# Altium PCB PCB1-C.PcbDoc (part 2 of 4)
Units mil, origin at the board's own origin, x right, y up, seen from the top; angles counter-clockwise.
Board outline 2476.38 x 3779.53 mil, 2 copper layers (Top Layer, Bottom Layer); 106 components, 105 nets, 404 pads, 256 vias.
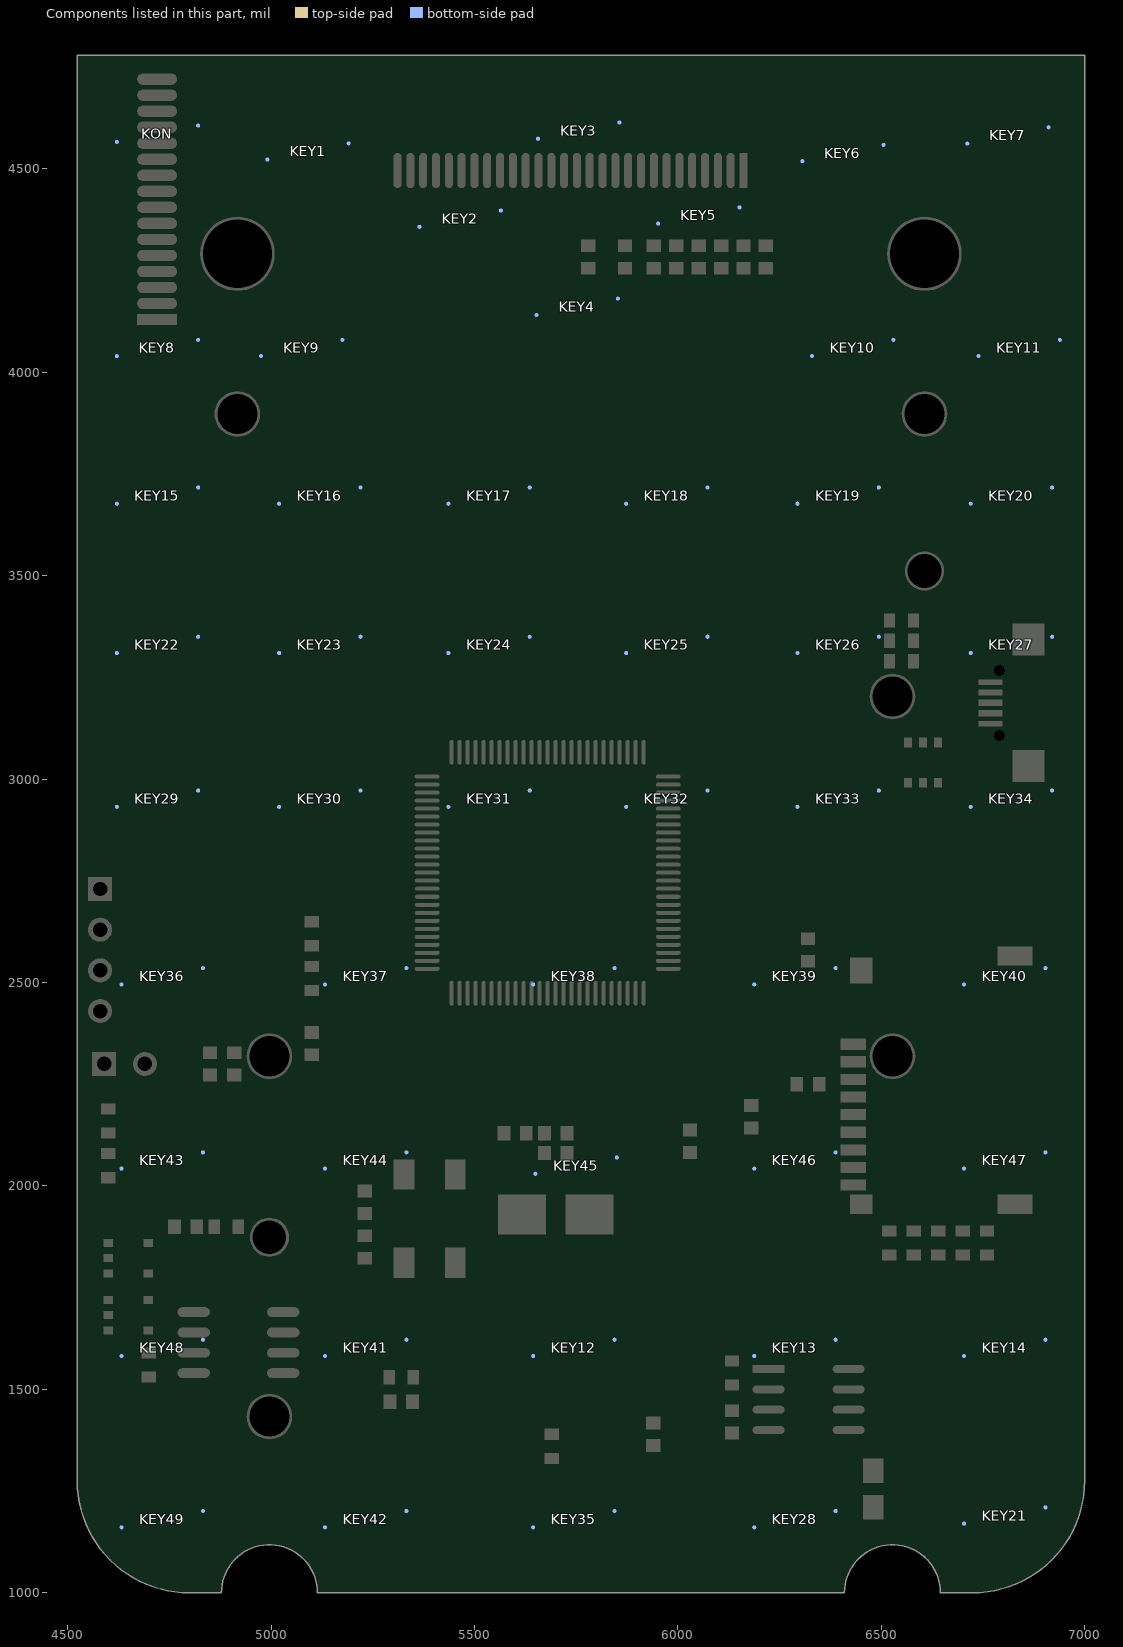
[diagram p2: the components of this part, seen from the top]

## Footprints (in the part's own frame and the unit in brackets; to place one, negate y for a bottom-side part, rotate by r counter-clockwise, add the part's x,y. Pads: shape width x height; smd on the part's side, far side on the other; paste and mask are expansions set on the pad) (continued)
Button#20 [mil]
  round 10 smd: 1(120,0) 2(320,-40)
  Top Layer lines w10: 320.19,-12 319,-12 146,-12 ; 319,26 318.19,26 307,26 150,26 ; 312,-47 160,-47 ; 304,6 140,6 127,6 126,6 ; 303,62 172,62 ; 291,-30 152.5,-30 140,-30 127,-30 ; 287,44 134,44 ; 268,-65 149,-65 ; 211.96,-101.38 cw(c223.45,0.14) 209,-101 cw(c223.45,0.14) 172.3,-88.3 cw(c223.45,0.14) 121.29,1.29 cw(c223.45,0.14) 121.37,4.13 cw(c223.45,0.14) 121.46,6 cw(c223.45,0.14) 127,33.82 cw(c223.45,0.14) 128.95,38.95 cw(c223.45,0.14) 131.18,44 cw(c223.45,0.14) 208.82,101.24 ; 324.43,-7.76 ccw(c222.55,-0.14) 324.28,9.28 ; 324.43,-7.76 ccw(c222.55,-0.14) 324.28,9.28 ; 324.43,-7.76 ccw(c222.55,-0.14) 324.28,9.28 ; 324.43,-7.76 ccw(c222.55,-0.14) 324.28,9.28 ; 324.43,-7.76 cw(c222.55,-0.14) 319,-33.82 ; 324.43,-7.76 cw(c222.55,-0.14) 319,-33.82 ; 324.43,-7.76 cw(c222.55,-0.14) 319,-33.82 ; 324.43,-7.76 cw(c222.55,-0.14) 319,-33.82 ; 324.28,9.28 ccw(c222.55,-0.14) 320.81,27.81 ; 324.28,9.28 ccw(c222.55,-0.14) 320.81,27.81 ; 324.28,9.28 ccw(c222.55,-0.14) 320.81,27.81 ; 324.28,9.28 ccw(c222.55,-0.14) 320.81,27.81 ; 320.81,27.81 ccw(c222.55,-0.14) 303.64,62 ; 320.81,27.81 ccw(c222.55,-0.14) 303.64,62 ; 320.81,27.81 ccw(c222.55,-0.14) 303.64,62 ; 320.81,27.81 ccw(c222.55,-0.14) 303.64,62 ; 319,-33.82 cw(c222.55,-0.14) 316.61,-40 ; 319,-33.82 cw(c222.55,-0.14) 316.61,-40 ; 319,-33.82 cw(c222.55,-0.14) 316.61,-40 ; 319,-33.82 cw(c222.55,-0.14) 316.61,-40 ; 316.61,-40 cw(c222.55,-0.14) 314.82,-44 ; 316.61,-40 cw(c222.55,-0.14) 314.82,-44 ; 316.61,-40 cw(c222.55,-0.14) 314.82,-44 ; 316.61,-40 cw(c222.55,-0.14) 314.82,-44 ; 314.82,-44 cw(c222.55,-0.14) 314.65,-44.35 ; 314.82,-44 cw(c222.55,-0.14) 314.65,-44.35 ; 314.82,-44 cw(c222.55,-0.14) 314.65,-44.35 ; 314.82,-44 cw(c222.55,-0.14) 314.65,-44.35 ; 314.65,-44.35 cw(c222.55,-0.14) 313.67,-46.33 ; 314.65,-44.35 cw(c222.55,-0.14) 313.67,-46.33 ; 314.65,-44.35 cw(c222.55,-0.14) 313.67,-46.33 ; 314.65,-44.35 cw(c222.55,-0.14) 313.67,-46.33 ; 313.67,-46.33 cw(c222.55,-0.14) 313.33,-47 ; 313.67,-46.33 cw(c222.55,-0.14) 313.33,-47 ; 313.67,-46.33 cw(c222.55,-0.14) 313.33,-47 ; 313.67,-46.33 cw(c222.55,-0.14) 313.33,-47 ; 313.33,-47 cw(c222.55,-0.14) 268.74,-91.26 ; 313.33,-47 cw(c222.55,-0.14) 268.74,-91.26 ; 313.33,-47 cw(c222.55,-0.14) 268.74,-91.26 ; 313.33,-47 cw(c222.55,-0.14) 268.74,-91.26 ; 303.64,62 ccw(c222.55,-0.14) 303,62.83 ; 303.64,62 ccw(c222.55,-0.14) 303,62.83 ; 303.64,62 ccw(c222.55,-0.14) 303,62.83 ; 303.64,62 ccw(c222.55,-0.14) 303,62.83 ; 303,62.83 ccw(c222.55,-0.14) 235.89,101.15 ; 303,62.83 ccw(c222.55,-0.14) 235.89,101.15 ; 303,62.83 ccw(c222.55,-0.14) 235.89,101.15 ; 303,62.83 ccw(c222.55,-0.14) 235.89,101.15 ; 268.74,-91.26 cw(c222.55,-0.14) 238.02,-101.12 ; 268.74,-91.26 cw(c222.55,-0.14) 238.02,-101.12 ; 268.74,-91.26 cw(c222.55,-0.14) 238.02,-101.12 ; 268.74,-91.26 cw(c222.55,-0.14) 238.02,-101.12
Button#21 [mil]
  round 10 smd: 1(120,0) 2(320,-40)
  Top Layer lines w7: 320.19,-12 320,-12 319.6,-12 319,-12 318.6,-12 317.6,-12 146,-12 ; 319,26 318.6,26 317.6,26 306.1,26 150,26 ; 312,-47 300.6,-47 298.6,-47 160,-47 ; 303,62 302.6,62 172,62
  Top Layer lines w10: 304,6 136.1,6 130.6,6 127,6 126,6 ; 291,-30 146.6,-30 143.1,-30 130.6,-30 127,-30 ; 287,44 146.1,44 134,44 ; 268,-65 153.6,-65 149,-65 ; 235.89,101.15 cw(c222.55,-0.14) 237,101 cw(c222.55,-0.14) 282.18,82.82 cw(c222.55,-0.14) 283.6,81.78 cw(c222.55,-0.14) 303.6,62.06 cw(c222.55,-0.14) 303.64,62 cw(c222.55,-0.14) 305.5,59.5 cw(c222.55,-0.14) 306.47,58.13 cw(c222.55,-0.14) 315.89,41.4 cw(c222.55,-0.14) 318.6,34.67 cw(c222.55,-0.14) 319,33.55 cw(c222.55,-0.14) 319.6,31.78 cw(c222.55,-0.14) 320,30.53 cw(c222.55,-0.14) 321.6,24.89 cw(c222.55,-0.14) 324.3,9.06 ; 211.96,-101.38 cw(c223.45,0.14) 172.3,-88.3 cw(c223.45,0.14) 130.6,-42.48 cw(c223.45,0.14) 121.29,1.29 cw(c223.45,0.14) 121.46,6 cw(c223.45,0.14) 127,33.82 cw(c223.45,0.14) 128.95,38.95 cw(c223.45,0.14) 208.82,101.24 ; 324.69,-2.09 ccw(c222.55,-0.14) 324.3,9.06 ; 324.69,-2.09 ccw(c222.55,-0.14) 324.3,9.06 ; 324.69,-2.09 cw(c222.55,-0.14) 321.6,-25.16 ; 324.69,-2.09 cw(c222.55,-0.14) 321.6,-25.16 ; 321.6,-25.16 cw(c222.55,-0.14) 321.31,-26.29 ; 321.6,-25.16 cw(c222.55,-0.14) 321.31,-26.29 ; 321.31,-26.29 cw(c222.55,-0.14) 320,-30.81 ; 321.31,-26.29 cw(c222.55,-0.14) 320,-30.81 ; 320,-30.81 cw(c222.55,-0.14) 318.6,-34.94 ; 320,-30.81 cw(c222.55,-0.14) 318.6,-34.94 ; 318.6,-34.94 cw(c222.55,-0.14) 314.65,-44.35 ; 318.6,-34.94 cw(c222.55,-0.14) 314.65,-44.35 ; 314.65,-44.35 cw(c222.55,-0.14) 313.67,-46.33 ; 314.65,-44.35 cw(c222.55,-0.14) 313.67,-46.33 ; 313.67,-46.33 cw(c222.55,-0.14) 238.02,-101.12 ccw(c222.55,-0.14) 313.67,-46.33
Button#22 [mil]
  round 10 smd: 1(120,0) 2(320,-40)
  Top Layer lines w10: 320.19,-12 320,-12 303.5,-12 146,-12 ; 319,26 150,26 ; 312,-47 303.5,-47 303,-47 160,-47 ; 304,6 137.5,6 127,6 126,6 ; 303,62 262.5,62 172,62 ; 291,-30 138.5,-30 127,-30 ; 287,44 134,44 ; 268,-65 153.62,-65 149,-65 ; 211.95,-101.38 cw(c223.45,0.14) 181.75,-93.13 cw(c223.45,0.14) 135.01,-51.01 cw(c223.45,0.14) 130.18,-41.56 cw(c223.45,0.14) 122.23,-13.73 cw(c223.45,0.14) 121.29,0 cw(c223.45,0.14) 121.42,5.42 cw(c223.45,0.14) 121.46,6 cw(c223.45,0.14) 123.28,20.22 cw(c223.45,0.14) 127,33.82 cw(c223.45,0.14) 128.95,38.95 cw(c223.45,0.14) 131.18,44 cw(c223.45,0.14) 208.82,101.24 ; 322,23.25 cw(c222.55,-0.14) 320.19,-30.19 ; 322,23.25 cw(c222.55,-0.14) 320.19,-30.19 ; 322,23.25 cw(c222.55,-0.14) 320.19,-30.19 ; 322,23.25 cw(c222.55,-0.14) 320.19,-30.19 ; 322,23.25 ccw(c222.55,-0.14) 321.76,24.24 ; 322,23.25 ccw(c222.55,-0.14) 321.76,24.24 ; 322,23.25 ccw(c222.55,-0.14) 321.76,24.24 ; 322,23.25 ccw(c222.55,-0.14) 321.76,24.24 ; 321.76,24.24 ccw(c222.55,-0.14) 320.19,29.92 ; 321.76,24.24 ccw(c222.55,-0.14) 320.19,29.92 ; 321.76,24.24 ccw(c222.55,-0.14) 320.19,29.92 ; 321.76,24.24 ccw(c222.55,-0.14) 320.19,29.92 ; 320.19,-30.19 cw(c222.55,-0.14) 320,-30.81 ; 320.19,-30.19 cw(c222.55,-0.14) 320,-30.81 ; 320.19,-30.19 cw(c222.55,-0.14) 320,-30.81 ; 320.19,-30.19 cw(c222.55,-0.14) 320,-30.81 ; 320.19,29.92 ccw(c222.55,-0.14) 320,30.53 ; 320.19,29.92 ccw(c222.55,-0.14) 320,30.53 ; 320.19,29.92 ccw(c222.55,-0.14) 320,30.53 ; 320.19,29.92 ccw(c222.55,-0.14) 320,30.53 ; 320,-30.81 cw(c222.55,-0.14) 316.61,-40 ; 320,-30.81 cw(c222.55,-0.14) 316.61,-40 ; 320,-30.81 cw(c222.55,-0.14) 316.61,-40 ; 320,-30.81 cw(c222.55,-0.14) 316.61,-40 ; 320,30.53 ccw(c222.55,-0.14) 319,33.55 ; 320,30.53 ccw(c222.55,-0.14) 319,33.55 ; 320,30.53 ccw(c222.55,-0.14) 319,33.55 ; 320,30.53 ccw(c222.55,-0.14) 319,33.55 ; 319,33.55 ccw(c222.55,-0.14) 305.5,59.5 ; 319,33.55 ccw(c222.55,-0.14) 305.5,59.5 ; 319,33.55 ccw(c222.55,-0.14) 305.5,59.5 ; 319,33.55 ccw(c222.55,-0.14) 305.5,59.5 ; 316.61,-40 cw(c222.55,-0.14) 313.67,-46.33 ; 316.61,-40 cw(c222.55,-0.14) 313.67,-46.33 ; 316.61,-40 cw(c222.55,-0.14) 313.67,-46.33 ; 316.61,-40 cw(c222.55,-0.14) 313.67,-46.33 ; 313.67,-46.33 cw(c222.55,-0.14) 312.87,-47.87 ; 313.67,-46.33 cw(c222.55,-0.14) 312.87,-47.87 ; 313.67,-46.33 cw(c222.55,-0.14) 312.87,-47.87 ; 313.67,-46.33 cw(c222.55,-0.14) 312.87,-47.87 ; 312.87,-47.87 cw(c222.55,-0.14) 309.6,-53.6 ; 312.87,-47.87 cw(c222.55,-0.14) 309.6,-53.6 ; 312.87,-47.87 cw(c222.55,-0.14) 309.6,-53.6 ; 312.87,-47.87 cw(c222.55,-0.14) 309.6,-53.6 ; 309.6,-53.6 cw(c222.55,-0.14) 238.02,-101.12 ; 309.6,-53.6 cw(c222.55,-0.14) 238.02,-101.12 ; 309.6,-53.6 cw(c222.55,-0.14) 238.02,-101.12 ; 309.6,-53.6 cw(c222.55,-0.14) 238.02,-101.12 ; 305.5,59.5 ccw(c222.55,-0.14) 304.1,61.4 ; 305.5,59.5 ccw(c222.55,-0.14) 304.1,61.4 ; 305.5,59.5 ccw(c222.55,-0.14) 304.1,61.4 ; 305.5,59.5 ccw(c222.55,-0.14) 304.1,61.4 ; 304.1,61.4 ccw(c222.55,-0.14) 282.84,82.34 ; 304.1,61.4 ccw(c222.55,-0.14) 282.84,82.34 ; 304.1,61.4 ccw(c222.55,-0.14) 282.84,82.34 ; 304.1,61.4 ccw(c222.55,-0.14) 282.84,82.34 ; 282.84,82.34 ccw(c222.55,-0.14) 235.89,101.15 ; 282.84,82.34 ccw(c222.55,-0.14) 235.89,101.15 ; 282.84,82.34 ccw(c222.55,-0.14) 235.89,101.15 ; 282.84,82.34 ccw(c222.55,-0.14) 235.89,101.15
Button#23 [mil]
  round 10 smd: 1(120,0) 2(320,-40)
  Top Layer lines w10: 320.19,-12 315,-12 146,-12 ; 319,26 307.5,26 150,26 ; 312,-47 302.5,-47 160,-47 ; 304,6 131,6 129.95,6 127,6 126,6 ; 303,62 301.5,62 301,62 172,62 ; 291,-30 150,-30 131,-30 129.95,-30 127,-30 ; 287,44 134,44 ; 268,-65 149,-65 ; 238.02,-101.12 ccw(c222.55,-0.14) 314.65,-44.35 ccw(c222.55,-0.14) 316.61,-40 ccw(c222.55,-0.14) 320.57,-28.93 ccw(c222.55,-0.14) 321,-27.43 ccw(c222.55,-0.14) 324.69,-2.31 ccw(c222.55,-0.14) 324,11.91 ccw(c222.55,-0.14) 322.08,22.92 ccw(c222.55,-0.14) 320.19,29.92 ccw(c222.55,-0.14) 319,33.55 ccw(c222.55,-0.14) 309.5,53.5 ccw(c222.55,-0.14) 308.66,54.84 ccw(c222.55,-0.14) 305.5,59.5 ccw(c222.55,-0.14) 303.64,62 ccw(c222.55,-0.14) 277.53,85.97 ccw(c222.55,-0.14) 235.89,101.15 ; 211.96,-101.38 cw(c223.45,0.14) 169.46,-86.6 cw(c223.45,0.14) 143.82,-63.86 cw(c223.45,0.14) 135.15,-51.24 cw(c223.45,0.14) 135.01,-51.01 cw(c223.45,0.14) 132.88,-47.12 cw(c223.45,0.14) 129.95,-41.04 cw(c223.45,0.14) 127,-33.55 cw(c223.45,0.14) 121.46,6 cw(c223.45,0.14) 126,30.81 cw(c223.45,0.14) 127,33.82 cw(c223.45,0.14) 128.95,38.95 cw(c223.45,0.14) 129.95,41.31 cw(c223.45,0.14) 130.47,42.47 cw(c223.45,0.14) 208.82,101.24
Button#24 [mil]
  round 10 smd: 1(120,0) 2(320,-40)
  Top Layer lines w10: 320.19,-12 318.5,-12 318,-12 146,-12 ; 319,26 318.5,26 306,26 150,26 ; 312,-47 306,-47 160,-47 ; 304,6 130,6 129,6 128,6 126,6 ; 303,62 172,62 ; 291,-30 143.5,-30 138.5,-30 129.22,-30 129,-30 128,-30 127,-30 ; 287,44 140,44 134,44 ; 268,-65 166,-65 154,-65 149,-65 ; 238.02,-101.12 ccw(c222.55,-0.14) 314.65,-44.35 ccw(c222.55,-0.14) 316.61,-40 ccw(c222.55,-0.14) 320.19,-30.19 ccw(c222.55,-0.14) 319,33.55 ccw(c222.55,-0.14) 318.5,34.95 ccw(c222.55,-0.14) 305.5,59.5 ccw(c222.55,-0.14) 237,101 ccw(c222.55,-0.14) 235.89,101.15 ; 211.95,-101.38 cw(c223.45,0.14) 188.78,-95.97 cw(c223.45,0.14) 137.34,-54.84 cw(c223.45,0.14) 135.01,-51.01 cw(c223.45,0.14) 130.73,-42.77 cw(c223.45,0.14) 129.88,-40.88 cw(c223.45,0.14) 129.02,-38.86 cw(c223.45,0.14) 129,-38.81 cw(c223.45,0.14) 128,-36.29 cw(c223.45,0.14) 121.29,1.29 cw(c223.45,0.14) 128,36.56 cw(c223.45,0.14) 128.95,38.95 cw(c223.45,0.14) 131.18,44 cw(c223.45,0.14) 208.82,101.24
Button#25 [mil]
  round 10 smd: 1(120,0) 2(320,-40)
  Top Layer lines w7: 320.19,-12 319,-12 318,-12 146,-12 ; 319,26 308.5,26 150,26 ; 312,-47 300,-47 160,-47 ; 303,62 302,62 172,62
  Top Layer lines w10: 304,6 139,6 127,6 126,6 ; 291,-30 155.5,-30 138.5,-30 127,-30 ; 287,44 134,44 ; 268,-65 228,-65 155.5,-65 149,-65 ; 238.02,-101.12 ccw(c222.55,-0.14) 268.74,-91.26 ccw(c222.55,-0.14) 313.33,-47 ccw(c222.55,-0.14) 313.67,-46.33 ccw(c222.55,-0.14) 314.65,-44.35 ccw(c222.55,-0.14) 316.61,-40 ccw(c222.55,-0.14) 321.52,-25.48 ccw(c222.55,-0.14) 324.02,-12 ccw(c222.55,-0.14) 320.19,29.92 ccw(c222.55,-0.14) 319,33.55 ccw(c222.55,-0.14) 307.73,56.27 ccw(c222.55,-0.14) 305.5,59.5 ccw(c222.55,-0.14) 303.64,62 ccw(c222.55,-0.14) 235.89,101.15 ; 211.96,-101.38 cw(c223.45,0.14) 135.01,-51.01 cw(c223.45,0.14) 122.23,-13.73 cw(c223.45,0.14) 121.29,0 cw(c223.45,0.14) 121.42,5.42 cw(c223.45,0.14) 121.46,6 cw(c223.45,0.14) 123.54,21.46 cw(c223.45,0.14) 127,33.82 cw(c223.45,0.14) 128.95,38.95 cw(c223.45,0.14) 131.18,44 cw(c223.45,0.14) 208.82,101.24
Button#26 [mil]
  round 10 smd: 1(120,0) 2(320,-40)
  Top Layer lines w10: 320.19,-12 319,-12 299,-12 146,-12 ; 319,26 150,26 ; 312,-47 303,-47 160,-47 ; 304,6 139,6 127,6 126,6 ; 303,62 301.5,62 172,62 ; 291,-30 143,-30 141,-30 127,-30 ; 287,44 134,44 ; 268,-65 157,-65 149,-65 ; 238.02,-101.12 ccw(c222.55,-0.14) 313.33,-47 ccw(c222.55,-0.14) 314.65,-44.35 ccw(c222.55,-0.14) 316.61,-40 ccw(c222.55,-0.14) 319,-33.82 ccw(c222.55,-0.14) 324,11.91 ccw(c222.55,-0.14) 322.08,22.92 ccw(c222.55,-0.14) 321.31,26 ccw(c222.55,-0.14) 320.19,29.92 ccw(c222.55,-0.14) 319.78,31.23 ccw(c222.55,-0.14) 319,33.55 ccw(c222.55,-0.14) 308.66,54.84 ccw(c222.55,-0.14) 305.5,59.5 ccw(c222.55,-0.14) 235.89,101.15 ; 211.96,-101.38 cw(c223.45,0.14) 140.5,-59.5 cw(c223.45,0.14) 135.01,-51.01 cw(c223.45,0.14) 121.29,1.29 cw(c223.45,0.14) 121.46,6 cw(c223.45,0.14) 127,33.82 cw(c223.45,0.14) 128.95,38.95 cw(c223.45,0.14) 128.97,39 cw(c223.45,0.14) 131.18,44 cw(c223.45,0.14) 208.82,101.24
Button#27 [mil]
  round 10 smd: 1(120,0) 2(320,-40)
  Top Layer lines w10: 320.19,-12 315,-12 146,-12 ; 319,26 150,26 ; 312,-47 160,-47 ; 304,6 140,6 130,6 127.5,6 127,6 126,6 ; 303,62 302.5,62 172,62 ; 291,-30 140,-30 132.5,-30 130,-30 127,-30 ; 287,44 140,44 134,44 ; 268,-65 149,-65 ; 208.82,101.24 ccw(c223.45,0.14) 207.22,101 ccw(c223.45,0.14) 188.14,96 ccw(c223.45,0.14) 179.94,92.57 ; 324.69,-2.31 ccw(c222.55,-0.14) 321.31,26 ; 324.69,-2.31 ccw(c222.55,-0.14) 321.31,26 ; 324.69,-2.31 ccw(c222.55,-0.14) 321.31,26 ; 324.69,-2.31 ccw(c222.55,-0.14) 321.31,26 ; 324.69,-2.31 cw(c222.55,-0.14) 324.26,-9.74 ; 324.69,-2.31 cw(c222.55,-0.14) 324.26,-9.74 ; 324.69,-2.31 cw(c222.55,-0.14) 324.26,-9.74 ; 324.69,-2.31 cw(c222.55,-0.14) 324.26,-9.74 ; 324.26,-9.74 cw(c222.55,-0.14) 323,-18.76 ; 324.26,-9.74 cw(c222.55,-0.14) 323,-18.76 ; 324.26,-9.74 cw(c222.55,-0.14) 323,-18.76 ; 324.26,-9.74 cw(c222.55,-0.14) 323,-18.76 ; 323,-18.76 cw(c222.55,-0.14) 320.19,-30.19 ; 323,-18.76 cw(c222.55,-0.14) 320.19,-30.19 ; 323,-18.76 cw(c222.55,-0.14) 320.19,-30.19 ; 323,-18.76 cw(c222.55,-0.14) 320.19,-30.19 ; 321.31,26 ccw(c222.55,-0.14) 320.19,29.92 ; 321.31,26 ccw(c222.55,-0.14) 320.19,29.92 ; 321.31,26 ccw(c222.55,-0.14) 320.19,29.92 ; 321.31,26 ccw(c222.55,-0.14) 320.19,29.92 ; 320.19,-30.19 cw(c222.55,-0.14) 320,-30.81 ; 320.19,-30.19 cw(c222.55,-0.14) 320,-30.81 ; 320.19,-30.19 cw(c222.55,-0.14) 320,-30.81 ; 320.19,-30.19 cw(c222.55,-0.14) 320,-30.81 ; 320.19,29.92 ccw(c222.55,-0.14) 319,33.55 ; 320.19,29.92 ccw(c222.55,-0.14) 319,33.55 ; 320.19,29.92 ccw(c222.55,-0.14) 319,33.55 ; 320.19,29.92 ccw(c222.55,-0.14) 319,33.55 ; 320,-30.81 cw(c222.55,-0.14) 314.65,-44.35 ; 320,-30.81 cw(c222.55,-0.14) 314.65,-44.35 ; 320,-30.81 cw(c222.55,-0.14) 314.65,-44.35 ; 320,-30.81 cw(c222.55,-0.14) 314.65,-44.35 ; 319,33.55 ccw(c222.55,-0.14) 306.69,57.81 ; 319,33.55 ccw(c222.55,-0.14) 306.69,57.81 ; 319,33.55 ccw(c222.55,-0.14) 306.69,57.81 ; 319,33.55 ccw(c222.55,-0.14) 306.69,57.81 ; 314.65,-44.35 cw(c222.55,-0.14) 313.67,-46.33 ; 314.65,-44.35 cw(c222.55,-0.14) 313.67,-46.33 ; 314.65,-44.35 cw(c222.55,-0.14) 313.67,-46.33 ; 314.65,-44.35 cw(c222.55,-0.14) 313.67,-46.33 ; 313.67,-46.33 cw(c222.55,-0.14) 268.74,-91.26 ; 313.67,-46.33 cw(c222.55,-0.14) 268.74,-91.26 ; 313.67,-46.33 cw(c222.55,-0.14) 268.74,-91.26 ; 313.67,-46.33 cw(c222.55,-0.14) 268.74,-91.26 ; 306.69,57.81 ccw(c222.55,-0.14) 305.5,59.5 ; 306.69,57.81 ccw(c222.55,-0.14) 305.5,59.5 ; 306.69,57.81 ccw(c222.55,-0.14) 305.5,59.5 ; 306.69,57.81 ccw(c222.55,-0.14) 305.5,59.5 ; 305.5,59.5 ccw(c222.55,-0.14) 235.89,101.15 ; 305.5,59.5 ccw(c222.55,-0.14) 235.89,101.15 ; 305.5,59.5 ccw(c222.55,-0.14) 235.89,101.15 ; 305.5,59.5 ccw(c222.55,-0.14) 235.89,101.15 ; 268.74,-91.26 cw(c222.55,-0.14) 238.02,-101.12 ccw(c222.55,-0.14) 268.74,-91.26 ; 211.96,-101.38 cw(c223.45,0.14) 135.01,-51.01 ; 211.96,-101.38 cw(c223.45,0.14) 135.01,-51.01 ; 211.96,-101.38 cw(c223.45,0.14) 135.01,-51.01 ; 211.96,-101.38 cw(c223.45,0.14) 135.01,-51.01 ; 179.94,92.57 ccw(c223.45,0.14) 134,49.49 ; 179.94,92.57 ccw(c223.45,0.14) 134,49.49 ; 179.94,92.57 ccw(c223.45,0.14) 134,49.49 ; 179.94,92.57 ccw(c223.45,0.14) 134,49.49 ; 135.01,-51.01 cw(c223.45,0.14) 130,-41.15 ; 135.01,-51.01 cw(c223.45,0.14) 130,-41.15 ; 135.01,-51.01 cw(c223.45,0.14) 130,-41.15 ; 135.01,-51.01 cw(c223.45,0.14) 130,-41.15 ; 134,49.49 ccw(c223.45,0.14) 127,33.82 ; 134,49.49 ccw(c223.45,0.14) 127,33.82 ; 134,49.49 ccw(c223.45,0.14) 127,33.82 ; 134,49.49 ccw(c223.45,0.14) 127,33.82 ; 130,-41.15 cw(c223.45,0.14) 125.33,-28.33 ; 130,-41.15 cw(c223.45,0.14) 125.33,-28.33 ; 130,-41.15 cw(c223.45,0.14) 125.33,-28.33 ; 130,-41.15 cw(c223.45,0.14) 125.33,-28.33 ; 127,33.82 ccw(c223.45,0.14) 124,23.52 ; 127,33.82 ccw(c223.45,0.14) 124,23.52 ; 127,33.82 ccw(c223.45,0.14) 124,23.52 ; 127,33.82 ccw(c223.45,0.14) 124,23.52 ; 125.33,-28.33 cw(c223.45,0.14) 123.25,-19.8 ; 125.33,-28.33 cw(c223.45,0.14) 123.25,-19.8 ; 125.33,-28.33 cw(c223.45,0.14) 123.25,-19.8 ; 125.33,-28.33 cw(c223.45,0.14) 123.25,-19.8 ; 124,23.52 ccw(c223.45,0.14) 121.53,7.12 ; 124,23.52 ccw(c223.45,0.14) 121.53,7.12 ; 124,23.52 ccw(c223.45,0.14) 121.53,7.12 ; 124,23.52 ccw(c223.45,0.14) 121.53,7.12 ; 123.25,-19.8 cw(c223.45,0.14) 121.29,-0.21 ; 123.25,-19.8 cw(c223.45,0.14) 121.29,-0.21 ; 123.25,-19.8 cw(c223.45,0.14) 121.29,-0.21 ; 123.25,-19.8 cw(c223.45,0.14) 121.29,-0.21 ; 121.53,7.12 ccw(c223.45,0.14) 121.29,0 ; 121.53,7.12 ccw(c223.45,0.14) 121.29,0 ; 121.53,7.12 ccw(c223.45,0.14) 121.29,0 ; 121.53,7.12 ccw(c223.45,0.14) 121.29,0 ; 121.29,-0.21 cw(c223.45,0.14) 121.29,0 ; 121.29,-0.21 cw(c223.45,0.14) 121.29,0 ; 121.29,-0.21 cw(c223.45,0.14) 121.29,0 ; 121.29,-0.21 cw(c223.45,0.14) 121.29,0
Button#28 [mil]
  round 10 smd: 1(120,0) 2(320,-40)
  Top Layer lines w7: 320.19,-12 320,-12 319.9,-12 301.9,-12 146,-12 ; 319,26 150,26 ; 312,-47 298.9,-47 160,-47 ; 303,62 289.9,62 172,62
  Top Layer lines w10: 304,6 145.4,6 127,6 126,6 ; 291,-30 137.4,-30 132.9,-30 127,-30 ; 287,44 134,44 ; 268,-65 149,-65 ; 238.02,-101.12 ccw(c222.55,-0.14) 313.33,-47 ccw(c222.55,-0.14) 314.37,-44.93 ccw(c222.55,-0.14) 318.9,-34.1 ccw(c222.55,-0.14) 320,-30.81 ccw(c222.55,-0.14) 323.53,-15.63 ccw(c222.55,-0.14) 320.19,29.92 ccw(c222.55,-0.14) 320,30.53 ccw(c222.55,-0.14) 319,33.55 ccw(c222.55,-0.14) 303.64,62 ccw(c222.55,-0.14) 282.18,82.82 ccw(c222.55,-0.14) 237,101 ccw(c222.55,-0.14) 235.89,101.15 ; 211.96,-101.38 cw(c223.45,0.14) 198.77,-99 cw(c223.45,0.14) 144.74,-65 cw(c223.45,0.14) 127.82,-35.81 cw(c223.45,0.14) 126,-30.53 cw(c223.45,0.14) 122.42,-15.02 cw(c223.45,0.14) 121.29,0 cw(c223.45,0.14) 121.43,5.53 cw(c223.45,0.14) 127,33.82 cw(c223.45,0.14) 128.95,38.95 cw(c223.45,0.14) 208.82,101.24
Button#29 [mil]
  round 10 smd: 1(120,0) 2(320,-40)
  Top Layer lines w10: 320.19,-12 320,-12 319,-12 308.63,-12 303.5,-12 146,-12 ; 319,26 314,26 150,26 ; 312,-47 308.49,-47 306.5,-47 295,-47 160,-47 ; 304,6 126,6 ; 303,62 172,62 ; 291,-30 146,-30 136,-30 127,-30 ; 287,44 134,44 ; 268,-65 156,-65 149,-65 ; 320.19,-30.19 cw(c222.55,-0.14) 320,-30.81 ; 320.19,-30.19 cw(c222.55,-0.14) 320,-30.81 ; 320.19,-30.19 ccw(c222.55,-0.14) 320.19,29.92 ; 320.19,-30.19 cw(c222.55,-0.14) 320,-30.81 ; 320.19,-30.19 cw(c222.55,-0.14) 320,-30.81 ; 320.19,-30.19 ccw(c222.55,-0.14) 320.19,29.92 ; 320.19,-30.19 ccw(c222.55,-0.14) 320.19,29.92 ; 320.19,-30.19 ccw(c222.55,-0.14) 320.19,29.92 ; 320.19,29.92 ccw(c222.55,-0.14) 320,30.53 ; 320.19,29.92 ccw(c222.55,-0.14) 320,30.53 ; 320.19,29.92 ccw(c222.55,-0.14) 320,30.53 ; 320.19,29.92 ccw(c222.55,-0.14) 320,30.53 ; 320,-30.81 cw(c222.55,-0.14) 319,-33.82 ; 320,-30.81 cw(c222.55,-0.14) 319,-33.82 ; 320,-30.81 cw(c222.55,-0.14) 319,-33.82 ; 320,-30.81 cw(c222.55,-0.14) 319,-33.82 ; 320,30.53 ccw(c222.55,-0.14) 319,33.55 ; 320,30.53 ccw(c222.55,-0.14) 319,33.55 ; 320,30.53 ccw(c222.55,-0.14) 319,33.55 ; 320,30.53 ccw(c222.55,-0.14) 319,33.55 ; 319,-33.82 cw(c222.55,-0.14) 318.62,-34.88 ; 319,-33.82 cw(c222.55,-0.14) 318.62,-34.88 ; 319,-33.82 cw(c222.55,-0.14) 318.62,-34.88 ; 319,-33.82 cw(c222.55,-0.14) 318.62,-34.88 ; 319,33.55 ccw(c222.55,-0.14) 305.5,59.5 ; 319,33.55 ccw(c222.55,-0.14) 305.5,59.5 ; 319,33.55 ccw(c222.55,-0.14) 305.5,59.5 ; 319,33.55 ccw(c222.55,-0.14) 305.5,59.5 ; 318.62,-34.88 cw(c222.55,-0.14) 316.61,-40 ; 318.62,-34.88 cw(c222.55,-0.14) 316.61,-40 ; 318.62,-34.88 cw(c222.55,-0.14) 316.61,-40 ; 318.62,-34.88 cw(c222.55,-0.14) 316.61,-40 ; 316.61,-40 cw(c222.55,-0.14) 314.65,-44.35 ; 316.61,-40 cw(c222.55,-0.14) 314.65,-44.35 ; 316.61,-40 cw(c222.55,-0.14) 314.65,-44.35 ; 316.61,-40 cw(c222.55,-0.14) 314.65,-44.35 ; 314.65,-44.35 cw(c222.55,-0.14) 313.67,-46.33 ; 314.65,-44.35 cw(c222.55,-0.14) 313.67,-46.33 ; 314.65,-44.35 cw(c222.55,-0.14) 313.67,-46.33 ; 314.65,-44.35 cw(c222.55,-0.14) 313.67,-46.33 ; 313.67,-46.33 cw(c222.55,-0.14) 308.49,-55.37 ; 313.67,-46.33 cw(c222.55,-0.14) 308.49,-55.37 ; 313.67,-46.33 cw(c222.55,-0.14) 308.49,-55.37 ; 313.67,-46.33 cw(c222.55,-0.14) 308.49,-55.37 ; 308.49,-55.37 cw(c222.55,-0.14) 308.3,-55.67 ; 308.49,-55.37 cw(c222.55,-0.14) 308.3,-55.67 ; 308.49,-55.37 cw(c222.55,-0.14) 308.3,-55.67 ; 308.49,-55.37 cw(c222.55,-0.14) 308.3,-55.67 ; 308.3,-55.67 cw(c222.55,-0.14) 268.74,-91.26 ; 308.3,-55.67 cw(c222.55,-0.14) 268.74,-91.26 ; 308.3,-55.67 cw(c222.55,-0.14) 268.74,-91.26 ; 308.3,-55.67 cw(c222.55,-0.14) 268.74,-91.26 ; 305.5,59.5 ccw(c222.55,-0.14) 235.89,101.15 ; 305.5,59.5 ccw(c222.55,-0.14) 235.89,101.15 ; 305.5,59.5 ccw(c222.55,-0.14) 235.89,101.15 ; 305.5,59.5 ccw(c222.55,-0.14) 235.89,101.15 ; 268.74,-91.26 cw(c222.55,-0.14) 238.02,-101.12 ; 268.74,-91.26 cw(c222.55,-0.14) 238.02,-101.12 ; 268.74,-91.26 cw(c222.55,-0.14) 238.02,-101.12 ; 268.74,-91.26 cw(c222.55,-0.14) 238.02,-101.12 ; 211.96,-101.38 cw(c223.45,0.14) 144.74,-65 ; 211.96,-101.38 cw(c223.45,0.14) 144.74,-65 ; 211.96,-101.38 cw(c223.45,0.14) 144.74,-65 ; 211.96,-101.38 cw(c223.45,0.14) 144.74,-65 ; 208.82,101.24 ccw(c223.45,0.14) 132.11,45.89 ; 208.82,101.24 ccw(c223.45,0.14) 132.11,45.89 ; 208.82,101.24 ccw(c223.45,0.14) 132.11,45.89 ; 208.82,101.24 ccw(c223.45,0.14) 132.11,45.89 ; 144.74,-65 cw(c223.45,0.14) 135.01,-51.01 ; 144.74,-65 cw(c223.45,0.14) 135.01,-51.01 ; 144.74,-65 cw(c223.45,0.14) 135.01,-51.01 ; 144.74,-65 cw(c223.45,0.14) 135.01,-51.01 ; 135.01,-51.01 cw(c223.45,0.14) 131.54,-44.46 ; 135.01,-51.01 cw(c223.45,0.14) 131.54,-44.46 ; 135.01,-51.01 cw(c223.45,0.14) 131.54,-44.46 ; 135.01,-51.01 cw(c223.45,0.14) 131.54,-44.46 ; 132.11,45.89 ccw(c223.45,0.14) 131.18,44 ; 132.11,45.89 ccw(c223.45,0.14) 131.18,44 ; 132.11,45.89 ccw(c223.45,0.14) 131.18,44 ; 132.11,45.89 ccw(c223.45,0.14) 131.18,44 ; 131.54,-44.46 cw(c223.45,0.14) 128.07,-36.47 ; 131.54,-44.46 cw(c223.45,0.14) 128.07,-36.47 ; 131.54,-44.46 cw(c223.45,0.14) 128.07,-36.47 ; 131.54,-44.46 cw(c223.45,0.14) 128.07,-36.47 ; 131.18,44 ccw(c223.45,0.14) 121.46,6 ; 131.18,44 ccw(c223.45,0.14) 121.46,6 ; 131.18,44 ccw(c223.45,0.14) 121.46,6 ; 131.18,44 ccw(c223.45,0.14) 121.46,6 ; 128.07,-36.47 cw(c223.45,0.14) 126,-30.53 ; 128.07,-36.47 cw(c223.45,0.14) 126,-30.53 ; 128.07,-36.47 cw(c223.45,0.14) 126,-30.53 ; 128.07,-36.47 cw(c223.45,0.14) 126,-30.53 ; 126,-30.53 cw(c223.45,0.14) 122.68,-16.68 ; 126,-30.53 cw(c223.45,0.14) 122.68,-16.68 ; 126,-30.53 cw(c223.45,0.14) 122.68,-16.68 ; 126,-30.53 cw(c223.45,0.14) 122.68,-16.68 ; 122.68,-16.68 cw(c223.45,0.14) 121.3,-1.3 ; 122.68,-16.68 cw(c223.45,0.14) 121.3,-1.3 ; 122.68,-16.68 cw(c223.45,0.14) 121.3,-1.3 ; 122.68,-16.68 cw(c223.45,0.14) 121.3,-1.3 ; 121.46,6 ccw(c223.45,0.14) 121.3,-1.3 ; 121.46,6 ccw(c223.45,0.14) 121.3,-1.3 ; 121.46,6 ccw(c223.45,0.14) 121.3,-1.3 ; 121.46,6 ccw(c223.45,0.14) 121.3,-1.3
Button#30 [mil]
  round 10 smd: 1(120,0) 2(320,-40)
  Top Layer lines w10: 320.19,-12 146,-12 ; 319,26 150,26 ; 312,-47 160,-47 ; 304,6 136.5,6 127,6 126,6 ; 303,62 299.84,62 299,62 172,62 ; 291,-30 148,-30 141.5,-30 127,-30 ; 287,44 135,44 134,44 ; 268,-65 153,-65 151.11,-65 149,-65 ; 238.02,-101.12 ccw(c222.55,-0.14) 313.33,-47 ccw(c222.55,-0.14) 313.67,-46.33 ccw(c222.55,-0.14) 316.61,-40 ccw(c222.55,-0.14) 324.43,-7.76 ccw(c222.55,-0.14) 322.08,22.92 ccw(c222.55,-0.14) 320.19,29.92 ccw(c222.55,-0.14) 319,33.55 ccw(c222.55,-0.14) 312.27,48.73 ccw(c222.55,-0.14) 310.27,52.23 ccw(c222.55,-0.14) 305.5,59.5 ccw(c222.55,-0.14) 303.64,62 ccw(c222.55,-0.14) 252.69,97.48 ccw(c222.55,-0.14) 250.95,98 ccw(c222.55,-0.14) 235.89,101.15 ; 211.96,-101.38 cw(c223.45,0.14) 151.11,-72 cw(c223.45,0.14) 135.01,-51.01 cw(c223.45,0.14) 121.29,1.29 cw(c223.45,0.14) 121.46,6 cw(c223.45,0.14) 127,33.82 cw(c223.45,0.14) 128.28,37.28 cw(c223.45,0.14) 128.95,38.95 cw(c223.45,0.14) 208.82,101.24
Button#31 [mil]
  round 10 smd: 1(120,0) 2(320,-40)
  Top Layer lines w10: 320.19,-12 320,-12 319,-12 146,-12 ; 319,26 316,26 150,26 ; 312,-47 160,-47 ; 304,6 132,6 131,6 127,6 126,6 ; 303,62 294.5,62 172,62 ; 291,-30 132,-30 131,-30 127,-30 ; 287,44 143.5,44 134,44 ; 268,-65 149,-65 ; 238.02,-101.12 ccw(c222.55,-0.14) 314.65,-44.35 ccw(c222.55,-0.14) 316.61,-40 ccw(c222.55,-0.14) 319,-33.82 ccw(c222.55,-0.14) 320,-30.81 ccw(c222.55,-0.14) 320.19,-30.19 ccw(c222.55,-0.14) 319,33.55 ccw(c222.55,-0.14) 316.5,40 ccw(c222.55,-0.14) 316,41.15 ccw(c222.55,-0.14) 305.5,59.5 ccw(c222.55,-0.14) 303.64,62 ccw(c222.55,-0.14) 282.18,82.82 ccw(c222.55,-0.14) 254.2,97 ccw(c222.55,-0.14) 235.89,101.15 ; 211.96,-101.38 cw(c223.45,0.14) 144.74,-65 cw(c223.45,0.14) 135.01,-51.01 cw(c223.45,0.14) 131,-43.34 cw(c223.45,0.14) 127,-33.55 cw(c223.45,0.14) 126,-30.53 cw(c223.45,0.14) 123.92,-22.92 cw(c223.45,0.14) 121.29,-1.03 cw(c223.45,0.14) 121.29,1.29 cw(c223.45,0.14) 121.46,6 cw(c223.45,0.14) 127,33.82 cw(c223.45,0.14) 128.95,38.95 cw(c223.45,0.14) 131.18,44 cw(c223.45,0.14) 208.82,101.24
Button#32 [mil]
  round 10 smd: 1(120,0) 2(320,-40)
  Top Layer lines w7: 320.19,-12 319,-12 146,-12 ; 319,26 150,26 ; 312,-47 292,-47 283,-47 160,-47 ; 303,62 172,62
  Top Layer lines w10: 304,6 127,6 126,6 ; 291,-30 141.5,-30 127,-30 ; 287,44 137,44 134,44 ; 268,-65 230.5,-65 149,-65 ; 238.02,-101.12 ccw(c222.55,-0.14) 314.65,-44.35 ccw(c222.55,-0.14) 315.53,-42.47 ccw(c222.55,-0.14) 324,-12.18 ccw(c222.55,-0.14) 324.43,-7.76 ccw(c222.55,-0.14) 324.51,-6.49 ccw(c222.55,-0.14) 324,11.91 ccw(c222.55,-0.14) 322.08,22.92 ccw(c222.55,-0.14) 320.19,29.92 ccw(c222.55,-0.14) 319,33.55 ccw(c222.55,-0.14) 303.64,62 ccw(c222.55,-0.14) 282.18,82.82 ccw(c222.55,-0.14) 272.47,89 ccw(c222.55,-0.14) 247.23,99 ccw(c222.55,-0.14) 235.89,101.15 ; 211.96,-101.38 cw(c223.45,0.14) 192.78,-97.31 cw(c223.45,0.14) 153.14,-73.99 cw(c223.45,0.14) 144.74,-65 cw(c223.45,0.14) 135.01,-51.01 cw(c223.45,0.14) 126,-30.53 cw(c223.45,0.14) 121.82,-10.32 cw(c223.45,0.14) 121.29,1.29 cw(c223.45,0.14) 121.42,5.42 cw(c223.45,0.14) 121.46,6 cw(c223.45,0.14) 127,33.82 cw(c223.45,0.14) 127.1,34.1 cw(c223.45,0.14) 128.95,38.95 cw(c223.45,0.14) 208.82,101.24
Button#33 [mil]
  round 10 smd: 1(120,0) 2(320,-40)
  Top Layer lines w10: 320.19,-12 320,-12 311,-12 146,-12 ; 319,26 150,26 ; 312,-47 299.5,-47 160,-47 ; 304,6 136.5,6 129,6 126.5,6 126,6 ; 303,62 302,62 301.5,62 293,62 172,62 ; 291,-30 148,-30 141.5,-30 129,-30 127,-30 ; 287,44 145,44 134,44 ; 268,-65 149,-65 ; 238.02,-101.12 ccw(c222.55,-0.14) 314.65,-44.35 ccw(c222.55,-0.14) 316.61,-40 ccw(c222.55,-0.14) 320,-30.81 ccw(c222.55,-0.14) 323.57,-15.38 ccw(c222.55,-0.14) 324,-12.18 ccw(c222.55,-0.14) 324,11.91 ccw(c222.55,-0.14) 320,30.53 ccw(c222.55,-0.14) 319,33.55 ccw(c222.55,-0.14) 317.55,37.45 ccw(c222.55,-0.14) 308.66,54.84 ccw(c222.55,-0.14) 307.73,56.27 ccw(c222.55,-0.14) 305.5,59.5 ccw(c222.55,-0.14) 260.14,94.86 ccw(c222.55,-0.14) 237,101 ccw(c222.55,-0.14) 235.89,101.15 ; 211.96,-101.38 cw(c223.45,0.14) 138.27,-56.27 ; 211.96,-101.38 cw(c223.45,0.14) 138.27,-56.27 ; 211.96,-101.38 cw(c223.45,0.14) 138.27,-56.27 ; 211.96,-101.38 cw(c223.45,0.14) 138.27,-56.27 ; 208.82,101.24 ccw(c223.45,0.14) 168.01,85.95 ; 208.82,101.24 ccw(c223.45,0.14) 168.01,85.95 ; 208.82,101.24 ccw(c223.45,0.14) 168.01,85.95 ; 208.82,101.24 ccw(c223.45,0.14) 168.01,85.95 ; 168.01,85.94 ccw(c223.45,0.14) 137.64,55.58 ; 168.01,85.94 ccw(c223.45,0.14) 137.64,55.58 ; 168.01,85.95 ccw(c223.45,0.14) 137.64,55.58 ; 168.01,85.94 ccw(c223.45,0.14) 137.64,55.58 ; 138.27,-56.27 cw(c223.45,0.14) 135.01,-51.01 ; 138.27,-56.27 cw(c223.45,0.14) 135.01,-51.01 ; 138.27,-56.27 cw(c223.45,0.14) 135.01,-51.01 ; 138.27,-56.27 cw(c223.45,0.14) 135.01,-51.01 ; 137.64,55.57 ccw(c223.45,0.14) 134,49.49 ; 137.64,55.57 ccw(c223.45,0.14) 134,49.49 ; 137.64,55.57 ccw(c223.45,0.14) 134,49.49 ; 137.64,55.58 ccw(c223.45,0.14) 134,49.49 ; 135.01,-51.01 cw(c223.45,0.14) 132.2,-45.8 ; 135.01,-51.01 cw(c223.45,0.14) 132.2,-45.8 ; 135.01,-51.01 cw(c223.45,0.14) 132.2,-45.8 ; 135.01,-51.01 cw(c223.45,0.14) 132.2,-45.8 ; 134,49.49 ccw(c223.45,0.14) 131.18,44 ; 134,49.49 ccw(c223.45,0.14) 131.18,44 ; 134,49.49 ccw(c223.45,0.14) 131.18,44 ; 134,49.49 ccw(c223.45,0.14) 131.18,44 ; 132.2,-45.8 cw(c223.45,0.14) 129,-38.81 ; 132.2,-45.8 cw(c223.45,0.14) 129,-38.81 ; 132.2,-45.8 cw(c223.45,0.14) 129,-38.81 ; 132.2,-45.8 cw(c223.45,0.14) 129,-38.81 ; 131.18,44 ccw(c223.45,0.14) 126.5,32.35 ; 131.18,44 ccw(c223.45,0.14) 126.5,32.35 ; 131.18,44 ccw(c223.45,0.14) 126.5,32.35 ; 131.18,44 ccw(c223.45,0.14) 126.5,32.35 ; 129,-38.81 cw(c223.45,0.14) 126.5,-32.08 ; 129,-38.81 cw(c223.45,0.14) 126.5,-32.08 ; 129,-38.81 cw(c223.45,0.14) 126.5,-32.08 ; 129,-38.81 cw(c223.45,0.14) 126.5,-32.08 ; 126.5,-32.08 cw(c223.45,0.14) 125.54,-29.04 ; 126.5,-32.08 cw(c223.45,0.14) 125.54,-29.04 ; 126.5,-32.08 cw(c223.45,0.14) 125.54,-29.04 ; 126.5,-32.08 cw(c223.45,0.14) 125.54,-29.04 ; 126.5,32.35 ccw(c223.45,0.14) 121.29,1.29 ; 126.5,32.35 ccw(c223.45,0.14) 121.29,1.29 ; 126.5,32.35 ccw(c223.45,0.14) 121.29,1.29 ; 126.5,32.35 ccw(c223.45,0.14) 121.29,1.29 ; 125.54,-29.04 cw(c223.45,0.14) 121.3,-1.3 ; 125.54,-29.04 cw(c223.45,0.14) 121.3,-1.3 ; 125.54,-29.04 cw(c223.45,0.14) 121.3,-1.3 ; 125.54,-29.04 cw(c223.45,0.14) 121.3,-1.3 ; 121.3,-1.3 cw(c223.45,0.14) 121.29,0 ; 121.3,-1.3 cw(c223.45,0.14) 121.29,0 ; 121.3,-1.3 cw(c223.45,0.14) 121.29,0 ; 121.3,-1.3 cw(c223.45,0.14) 121.29,0 ; 121.29,0 cw(c223.45,0.14) 121.29,1.29 ; 121.29,0 cw(c223.45,0.14) 121.29,1.29 ; 121.29,0 cw(c223.45,0.14) 121.29,1.29 ; 121.29,0 cw(c223.45,0.14) 121.29,1.29
Button#34 [mil]
  round 10 smd: 1(120,0) 2(320,-40)
  Top Layer lines w10: 320.19,-12 319.65,-12 319,-12 315,-12 302.5,-12 146,-12 ; 319,26 150,26 ; 312,-47 298,-47 277.5,-47 160,-47 ; 304,6 136.5,6 127,6 126,6 ; 303,62 302.5,62 172,62 ; 291,-30 141.5,-30 132,-30 127,-30 ; 287,44 136.51,44 134,44 ; 268,-65 149,-65 ; 238.02,-101.12 ccw(c222.55,-0.14) 290,-76.87 ccw(c222.55,-0.14) 313.67,-46.33 ccw(c222.55,-0.14) 314.65,-44.35 ccw(c222.55,-0.14) 317.76,-37.18 ccw(c222.55,-0.14) 319,-33.82 ccw(c222.55,-0.14) 319.65,-31.89 ; 211.95,-101.38 cw(c223.45,0.14) 135.01,-51.01 cw(c223.45,0.14) 131,-43.34 cw(c223.45,0.14) 127,-33.55 cw(c223.45,0.14) 121.29,1.29 cw(c223.45,0.14) 121.46,6 cw(c223.45,0.14) 127,33.82 cw(c223.45,0.14) 127.37,34.86 cw(c223.45,0.14) 128.95,38.95 cw(c223.45,0.14) 208.82,101.24 ; 322.8,-19.8 cw(c222.55,-0.14) 319.65,-31.88 ; 322.8,-19.8 ccw(c222.55,-0.14) 320.19,29.92 ; 322.8,-19.8 cw(c222.55,-0.14) 319.65,-31.88 ; 322.8,-19.8 ccw(c222.55,-0.14) 320.19,29.92 ; 322.8,-19.8 ccw(c222.55,-0.14) 320.19,29.92 ; 322.8,-19.8 ccw(c222.55,-0.14) 320.19,29.92 ; 322.8,-19.8 cw(c222.55,-0.14) 319.65,-31.89 ; 322.8,-19.8 cw(c222.55,-0.14) 319.65,-31.88 ; 320.19,29.92 ccw(c222.55,-0.14) 319.39,32.39 ; 320.19,29.92 ccw(c222.55,-0.14) 319.39,32.39 ; 320.19,29.92 ccw(c222.55,-0.14) 319.39,32.39 ; 320.19,29.92 ccw(c222.55,-0.14) 319.39,32.39 ; 319.39,32.39 ccw(c222.55,-0.14) 319,33.55 ; 319.39,32.39 ccw(c222.55,-0.14) 319,33.55 ; 319.39,32.39 ccw(c222.55,-0.14) 319,33.55 ; 319.39,32.39 ccw(c222.55,-0.14) 319,33.55 ; 319,33.55 ccw(c222.55,-0.14) 306.69,57.81 ; 319,33.55 ccw(c222.55,-0.14) 306.69,57.81 ; 319,33.55 ccw(c222.55,-0.14) 306.69,57.81 ; 319,33.55 ccw(c222.55,-0.14) 306.69,57.81 ; 306.69,57.81 ccw(c222.55,-0.14) 305.5,59.5 ; 306.69,57.81 ccw(c222.55,-0.14) 305.5,59.5 ; 306.69,57.81 ccw(c222.55,-0.14) 305.5,59.5 ; 306.69,57.81 ccw(c222.55,-0.14) 305.5,59.5 ; 305.5,59.5 ccw(c222.55,-0.14) 235.89,101.15 ; 305.5,59.5 ccw(c222.55,-0.14) 235.89,101.15 ; 305.5,59.5 ccw(c222.55,-0.14) 235.89,101.15 ; 305.5,59.5 ccw(c222.55,-0.14) 235.89,101.15
Button#35 [mil]
  round 10 smd: 1(120,0) 2(320,-40)
  Top Layer lines w7: 320.19,-12 318.5,-12 317.5,-12 146,-12 ; 319,26 317.5,26 150,26 ; 312,-47 282.5,-47 160,-47 ; 303,62 172,62
  Top Layer lines w10: 304,6 139.5,6 127,6 126,6 ; 291,-30 152,-30 141.5,-30 127,-30 ; 287,44 160,44 134,44 ; 268,-65 149,-65 ; 211.96,-101.38 cw(c223.45,0.14) 209,-101 cw(c223.45,0.14) 146.7,-67.3 cw(c223.45,0.14) 136.5,-53.5 cw(c223.45,0.14) 134.25,-49.67 cw(c223.45,0.14) 121.29,1.29 cw(c223.45,0.14) 121.46,6 cw(c223.45,0.14) 127,33.82 cw(c223.45,0.14) 128.5,37.84 cw(c223.45,0.14) 128.95,38.95 cw(c223.45,0.14) 142.08,61.92 cw(c223.45,0.14) 208.82,101.24 ; 323.57,-15.38 ccw(c222.55,-0.14) 319,33.55 ; 323.57,-15.38 ccw(c222.55,-0.14) 319,33.55 ; 323.57,-15.38 ccw(c222.55,-0.14) 319,33.55 ; 323.57,-15.38 ccw(c222.55,-0.14) 319,33.55 ; 323.57,-15.38 cw(c222.55,-0.14) 320.19,-30.19 ; 323.57,-15.38 cw(c222.55,-0.14) 320.19,-30.19 ; 323.57,-15.38 cw(c222.55,-0.14) 320.19,-30.19 ; 323.57,-15.38 cw(c222.55,-0.14) 320.19,-30.19 ; 320.19,-30.19 cw(c222.55,-0.14) 317.6,-37.6 ; 320.19,-30.19 cw(c222.55,-0.14) 317.6,-37.6 ; 320.19,-30.19 cw(c222.55,-0.14) 317.6,-37.6 ; 320.19,-30.19 cw(c222.55,-0.14) 317.6,-37.6 ; 319,33.55 ccw(c222.55,-0.14) 305.5,59.5 ; 319,33.55 ccw(c222.55,-0.14) 305.5,59.5 ; 319,33.55 ccw(c222.55,-0.14) 305.5,59.5 ; 319,33.55 ccw(c222.55,-0.14) 305.5,59.5 ; 317.6,-37.6 cw(c222.55,-0.14) 314.65,-44.35 ; 317.6,-37.6 cw(c222.55,-0.14) 314.65,-44.35 ; 317.6,-37.6 cw(c222.55,-0.14) 314.65,-44.35 ; 317.6,-37.6 cw(c222.55,-0.14) 314.65,-44.35 ; 314.65,-44.35 cw(c222.55,-0.14) 313.67,-46.33 ; 314.65,-44.35 cw(c222.55,-0.14) 313.67,-46.33 ; 314.65,-44.35 cw(c222.55,-0.14) 313.67,-46.33 ; 314.65,-44.35 cw(c222.55,-0.14) 313.67,-46.33 ; 313.67,-46.33 cw(c222.55,-0.14) 283.5,-82.12 ; 313.67,-46.33 cw(c222.55,-0.14) 283.5,-82.12 ; 313.67,-46.33 cw(c222.55,-0.14) 283.5,-82.12 ; 313.67,-46.33 cw(c222.55,-0.14) 283.5,-82.12 ; 305.5,59.5 ccw(c222.55,-0.14) 303.64,62 ; 305.5,59.5 ccw(c222.55,-0.14) 303.64,62 ; 305.5,59.5 ccw(c222.55,-0.14) 303.64,62 ; 305.5,59.5 ccw(c222.55,-0.14) 303.64,62 ; 303.64,62 ccw(c222.55,-0.14) 235.89,101.15 ; 303.64,62 ccw(c222.55,-0.14) 235.89,101.15 ; 303.64,62 ccw(c222.55,-0.14) 235.89,101.15 ; 303.64,62 ccw(c222.55,-0.14) 235.89,101.15 ; 283.5,-82.12 cw(c222.55,-0.14) 268.74,-91.26 ; 283.5,-82.12 cw(c222.55,-0.14) 268.74,-91.26 ; 283.5,-82.12 cw(c222.55,-0.14) 268.74,-91.26 ; 283.5,-82.12 cw(c222.55,-0.14) 268.74,-91.26 ; 268.74,-91.26 cw(c222.55,-0.14) 238.02,-101.12 ; 268.74,-91.26 cw(c222.55,-0.14) 238.02,-101.12 ; 268.74,-91.26 cw(c222.55,-0.14) 238.02,-101.12 ; 268.74,-91.26 cw(c222.55,-0.14) 238.02,-101.12
Button#36 [mil]
  round 10 smd: 1(120,0) 2(320,-40)
  Top Layer lines w10: 320.19,-12 320,-12 319,-12 302.7,-12 146,-12 ; 319,26 299.1,26 150,26 ; 312,-47 305.7,-47 299.7,-47 160,-47 ; 304,6 138.1,6 127,6 126,6 ; 303,62 172,62 ; 291,-30 149.6,-30 143.3,-30 127,-30 ; 287,44 137.6,44 134,44 ; 268,-65 152.8,-65 149,-65 ; 211.96,-101.38 cw(c223.45,0.14) 146.7,-67.3 cw(c223.45,0.14) 121.29,1.29 cw(c223.45,0.14) 121.46,6 cw(c223.45,0.14) 126.78,33.18 cw(c223.45,0.14) 127,33.82 cw(c223.45,0.14) 128.7,38.34 cw(c223.45,0.14) 128.81,38.6 cw(c223.45,0.14) 128.95,38.95 cw(c223.45,0.14) 208.82,101.24 ; 324.43,-7.76 ccw(c222.55,-0.14) 320.19,29.92 ; 324.43,-7.76 ccw(c222.55,-0.14) 320.19,29.92 ; 324.43,-7.76 ccw(c222.55,-0.14) 320.19,29.92 ; 324.43,-7.76 ccw(c222.55,-0.14) 320.19,29.92 ; 324.43,-7.76 cw(c222.55,-0.14) 320,-30.81 ; 324.43,-7.76 cw(c222.55,-0.14) 320,-30.81 ; 324.43,-7.76 cw(c222.55,-0.14) 320,-30.81 ; 324.43,-7.76 cw(c222.55,-0.14) 320,-30.81 ; 320.19,29.92 ccw(c222.55,-0.14) 320,30.53 ; 320.19,29.92 ccw(c222.55,-0.14) 320,30.53 ; 320.19,29.92 ccw(c222.55,-0.14) 320,30.53 ; 320.19,29.92 ccw(c222.55,-0.14) 320,30.53 ; 320,-30.81 cw(c222.55,-0.14) 319,-33.82 ; 320,-30.81 cw(c222.55,-0.14) 319,-33.82 ; 320,-30.81 cw(c222.55,-0.14) 319,-33.82 ; 320,-30.81 cw(c222.55,-0.14) 319,-33.82 ; 320,30.53 ccw(c222.55,-0.14) 319,33.55 ; 320,30.53 ccw(c222.55,-0.14) 319,33.55 ; 320,30.53 ccw(c222.55,-0.14) 319,33.55 ; 320,30.53 ccw(c222.55,-0.14) 319,33.55 ; 319,-33.82 cw(c222.55,-0.14) 315.7,-42.09 ; 319,-33.82 cw(c222.55,-0.14) 315.7,-42.09 ; 319,-33.82 cw(c222.55,-0.14) 315.7,-42.09 ; 319,-33.82 cw(c222.55,-0.14) 315.7,-42.09 ; 319,33.55 ccw(c222.55,-0.14) 315.46,42.36 ; 319,33.55 ccw(c222.55,-0.14) 315.46,42.36 ; 319,33.55 ccw(c222.55,-0.14) 315.46,42.36 ; 319,33.55 ccw(c222.55,-0.14) 315.46,42.36 ; 315.7,-42.09 cw(c222.55,-0.14) 314.65,-44.35 ; 315.7,-42.09 cw(c222.55,-0.14) 314.65,-44.35 ; 315.7,-42.09 cw(c222.55,-0.14) 314.65,-44.35 ; 315.7,-42.09 cw(c222.55,-0.14) 314.65,-44.35 ; 315.46,42.36 ccw(c222.55,-0.14) 305.5,59.5 ; 315.46,42.36 ccw(c222.55,-0.14) 305.5,59.5 ; 315.46,42.36 ccw(c222.55,-0.14) 305.5,59.5 ; 315.46,42.36 ccw(c222.55,-0.14) 305.5,59.5 ; 314.65,-44.35 cw(c222.55,-0.14) 313.67,-46.33 ; 314.65,-44.35 cw(c222.55,-0.14) 313.67,-46.33 ; 314.65,-44.35 cw(c222.55,-0.14) 313.67,-46.33 ; 314.65,-44.35 cw(c222.55,-0.14) 313.67,-46.33 ; 313.67,-46.33 cw(c222.55,-0.14) 313.33,-47 ; 313.67,-46.33 cw(c222.55,-0.14) 313.33,-47 ; 313.67,-46.33 cw(c222.55,-0.14) 313.33,-47 ; 313.67,-46.33 cw(c222.55,-0.14) 313.33,-47 ; 313.33,-47 cw(c222.55,-0.14) 308.06,-56.04 ; 313.33,-47 cw(c222.55,-0.14) 308.06,-56.04 ; 313.33,-47 cw(c222.55,-0.14) 308.06,-56.04 ; 313.33,-47 cw(c222.55,-0.14) 308.06,-56.04 ; 308.06,-56.04 cw(c222.55,-0.14) 305.7,-59.49 ; 308.06,-56.04 cw(c222.55,-0.14) 305.7,-59.49 ; 308.06,-56.04 cw(c222.55,-0.14) 305.7,-59.49 ; 308.06,-56.04 cw(c222.55,-0.14) 305.7,-59.49 ; 305.7,-59.49 cw(c222.55,-0.14) 238.02,-101.12 ; 305.7,-59.49 cw(c222.55,-0.14) 238.02,-101.12 ; 305.7,-59.49 cw(c222.55,-0.14) 238.02,-101.12 ; 305.7,-59.49 cw(c222.55,-0.14) 238.02,-101.12 ; 305.5,59.5 ccw(c222.55,-0.14) 303.64,62 ; 305.5,59.5 ccw(c222.55,-0.14) 303.64,62 ; 305.5,59.5 ccw(c222.55,-0.14) 303.64,62 ; 305.5,59.5 ccw(c222.55,-0.14) 303.64,62 ; 303.64,62 ccw(c222.55,-0.14) 235.89,101.15 ; 303.64,62 ccw(c222.55,-0.14) 235.89,101.15 ; 303.64,62 ccw(c222.55,-0.14) 235.89,101.15 ; 303.64,62 ccw(c222.55,-0.14) 235.89,101.15
Button#37 [mil]
  round 10 smd: 1(120,0) 2(320,-40)
  Top Layer lines w10: 320.19,-12 319,-12 302.7,-12 146,-12 ; 319,26 150,26 ; 312,-47 306.7,-47 160,-47 ; 304,6 126,6 ; 303,62 290.2,62 250.99,62 172,62 ; 291,-30 162.7,-30 140.2,-30 127,-30 ; 287,44 152.7,44 134,44 ; 268,-65 227.7,-65 162.7,-65 149,-65 ; 238.02,-101.12 ccw(c222.55,-0.14) 313.67,-46.33 ccw(c222.55,-0.14) 314.65,-44.35 ccw(c222.55,-0.14) 324.7,-1.73 ccw(c222.55,-0.14) 324.7,1.46 ccw(c222.55,-0.14) 320.19,29.92 ccw(c222.55,-0.14) 319,33.55 ccw(c222.55,-0.14) 305.5,59.5 ccw(c222.55,-0.14) 235.89,101.15 ; 211.96,-101.38 cw(c223.45,0.14) 211.7,-101.35 cw(c223.45,0.14) 146.7,-67.3 cw(c223.45,0.14) 144.74,-65 cw(c223.45,0.14) 135.01,-51.01 cw(c223.45,0.14) 127,-33.55 cw(c223.45,0.14) 125.33,-28.33 cw(c223.45,0.14) 121.7,-9.03 cw(c223.45,0.14) 121.46,6 cw(c223.45,0.14) 126,30.81 cw(c223.45,0.14) 128.95,38.95 cw(c223.45,0.14) 131.18,44 cw(c223.45,0.14) 139.7,58.64 cw(c223.45,0.14) 204.9,100.6 cw(c223.45,0.14) 208.82,101.24
Button#38 [mil]
  round 10 smd: 1(120,0) 2(320,-40)
  Top Layer lines w10: 320.19,-12 320,-12 319.5,-12 317.5,-12 298,-12 146,-12 ; 319,26 313.1,26 236.9,26 150,26 ; 312,-47 302,-47 160,-47 ; 304,6 137.9,6 127,6 126,6 ; 303,62 172,62 ; 291,-30 149.4,-30 143.1,-30 127,-30 ; 287,44 134,44 ; 268,-65 152.6,-65 149,-65 ; 238.02,-101.12 ccw(c222.55,-0.14) 313.33,-47 ccw(c222.55,-0.14) 313.67,-46.33 ccw(c222.55,-0.14) 320,-30.81 ccw(c222.55,-0.14) 320,30.53 ccw(c222.55,-0.14) 319.5,32.08 ccw(c222.55,-0.14) 319,33.55 ccw(c222.55,-0.14) 305.5,59.5 ccw(c222.55,-0.14) 235.89,101.15 ; 211.96,-101.38 cw(c223.45,0.14) 172.3,-88.3 cw(c223.45,0.14) 121.29,1.29 cw(c223.45,0.14) 121.46,6 cw(c223.45,0.14) 127,33.82 cw(c223.45,0.14) 128.5,37.84 cw(c223.45,0.14) 128.81,38.6 cw(c223.45,0.14) 128.95,38.95 cw(c223.45,0.14) 131.18,44 cw(c223.45,0.14) 208.82,101.24
Button#39 [mil]
  round 10 smd: 1(120,0) 2(320,-40)
  Top Layer lines w7: 320.19,-12 146,-12 ; 319,26 303.3,26 150,26 ; 312,-47 160,-47 ; 303,62 301.9,62 172,62
  Top Layer lines w10: 304,6 127,6 126,6 ; 291,-30 154.8,-30 140.5,-30 127,-30 ; 287,44 134,44 ; 268,-65 232.3,-65 156,-65 149,-65 ; 238.02,-101.12 ccw(c222.55,-0.14) 277.9,-86 ccw(c222.55,-0.14) 313.33,-47 ccw(c222.55,-0.14) 313.67,-46.33 ccw(c222.55,-0.14) 314.65,-44.35 ccw(c222.55,-0.14) 320.19,29.92 ccw(c222.55,-0.14) 235.89,101.15 ; 211.96,-101.38 cw(c223.45,0.14) 211.9,-101.37 cw(c223.45,0.14) 151.11,-72 cw(c223.45,0.14) 144.74,-65 cw(c223.45,0.14) 126,-30.53 cw(c223.45,0.14) 121.95,-11.45 cw(c223.45,0.14) 121.29,0 cw(c223.45,0.14) 121.43,5.53 cw(c223.45,0.14) 127,33.82 cw(c223.45,0.14) 128.95,38.95 cw(c223.45,0.14) 153.9,74.97 cw(c223.45,0.14) 208.82,101.24
Button#40 [mil]
  round 10 smd: 1(120,0) 2(320,-40)
  Top Layer lines w10: 320.19,-12 320,-12 319,-12 146,-12 ; 319,26 303,26 150,26 ; 312,-47 291.6,-47 284.2,-47 160,-47 ; 304,6 136.1,6 127,6 126,6 ; 303,62 301.6,62 229.6,62 172,62 ; 291,-30 148.6,-30 143.1,-30 127,-30 ; 287,44 136.1,44 134,44 ; 268,-65 167.82,-65 151.6,-65 149,-65 ; 238.02,-101.12 ccw(c222.55,-0.14) 313.67,-46.33 ccw(c222.55,-0.14) 315.1,-43.4 ccw(c222.55,-0.14) 320,-30.81 ccw(c222.55,-0.14) 324.51,-6.49 ccw(c222.55,-0.14) 322.95,18.75 ccw(c222.55,-0.14) 322.08,22.92 ccw(c222.55,-0.14) 320,30.53 ccw(c222.55,-0.14) 319,33.55 ccw(c222.55,-0.14) 308.48,55.12 ccw(c222.55,-0.14) 305.5,59.5 ccw(c222.55,-0.14) 282.18,82.82 ccw(c222.55,-0.14) 235.89,101.15 ; 211.96,-101.38 cw(c223.45,0.14) 202.72,-99.9 cw(c223.45,0.14) 145.08,-65.4 cw(c223.45,0.14) 121.29,1.29 cw(c223.45,0.14) 121.46,6 cw(c223.45,0.14) 127,33.82 cw(c223.45,0.14) 127.61,35.51 cw(c223.45,0.14) 128.95,38.95 cw(c223.45,0.14) 208.82,101.24
Button#41 [mil]
  round 10 smd: 1(120,0) 2(320,-40)
  Top Layer lines w10: 320.19,-12 318.7,-12 302.7,-12 146,-12 ; 319,26 302.7,26 150,26 ; 312,-47 291.7,-47 284.7,-47 282.2,-47 160,-47 ; 304,6 137.2,6 127,6 126,6 ; 303,62 172,62 ; 291,-30 142.2,-30 127.7,-30 127,-30 ; 287,44 137.7,44 134,44 ; 268,-65 165.2,-65 149,-65 ; 238.02,-101.12 ccw(c222.55,-0.14) 300.9,-65.7 ccw(c222.55,-0.14) 313.33,-47 ccw(c222.55,-0.14) 320,-30.81 ccw(c222.55,-0.14) 324.43,-7.76 ccw(c222.55,-0.14) 324.53,-6.17 ccw(c222.55,-0.14) 322.98,18.58 ccw(c222.55,-0.14) 322.28,22.01 ccw(c222.55,-0.14) 322.08,22.92 ccw(c222.55,-0.14) 316.56,39.86 ccw(c222.55,-0.14) 305.5,59.5 ccw(c222.55,-0.14) 282.18,82.82 ccw(c222.55,-0.14) 235.89,101.15 ; 211.96,-101.38 cw(c223.45,0.14) 155.55,-76.2 cw(c223.45,0.14) 144.74,-65 cw(c223.45,0.14) 135.01,-51.01 cw(c223.45,0.14) 126,-30.53 cw(c223.45,0.14) 125.83,-30 cw(c223.45,0.14) 125.06,-27.36 cw(c223.45,0.14) 121.7,-9.03 cw(c223.45,0.14) 121.29,1.29 cw(c223.45,0.14) 121.46,6 cw(c223.45,0.14) 121.7,9.31 cw(c223.45,0.14) 126.73,33.03 cw(c223.45,0.14) 127,33.82 cw(c223.45,0.14) 128.95,38.95 cw(c223.45,0.14) 131.18,44 cw(c223.45,0.14) 208.82,101.24
Button#42 [mil]
  round 10 smd: 1(120,0) 2(320,-40)
  Top Layer lines w7: 320.19,-12 319,-12 146,-12 ; 319,26 307.2,26 150,26 ; 312,-47 160,-47 ; 303,62 294.7,62 172,62
  Top Layer lines w10: 304,6 140.2,6 127,6 126,6 ; 291,-30 141.2,-30 127,-30 ; 287,44 134,44 ; 268,-65 149,-65 ; 211.96,-101.38 cw(c223.45,0.14) 209,-101 cw(c223.45,0.14) 144.74,-65 cw(c223.45,0.14) 135.01,-51.01 cw(c223.45,0.14) 127,-33.55 cw(c223.45,0.14) 121.29,0 cw(c223.45,0.14) 126,30.81 cw(c223.45,0.14) 127,33.82 cw(c223.45,0.14) 128.95,38.95 cw(c223.45,0.14) 131.18,44 cw(c223.45,0.14) 208.82,101.24 ; 323.87,-13.19 cw(c222.55,-0.14) 321.7,-24.76 ; 323.87,-13.19 ccw(c222.55,-0.14) 319,33.55 ; 323.87,-13.19 ccw(c222.55,-0.14) 319,33.55 ; 323.87,-13.19 cw(c222.55,-0.14) 321.7,-24.76 ; 323.87,-13.19 cw(c222.55,-0.14) 321.7,-24.76 ; 323.87,-13.19 cw(c222.55,-0.14) 321.7,-24.76 ; 323.87,-13.19 ccw(c222.55,-0.14) 319,33.55 ; 323.87,-13.19 ccw(c222.55,-0.14) 319,33.55 ; 321.7,-24.76 cw(c222.55,-0.14) 319,-33.82 ; 321.7,-24.76 cw(c222.55,-0.14) 319,-33.82 ; 321.7,-24.76 cw(c222.55,-0.14) 319,-33.82 ; 321.7,-24.76 cw(c222.55,-0.14) 319,-33.82 ; 319,-33.82 cw(c222.55,-0.14) 314.65,-44.35 ; 319,-33.82 cw(c222.55,-0.14) 314.65,-44.35 ; 319,-33.82 cw(c222.55,-0.14) 314.65,-44.35 ; 319,-33.82 cw(c222.55,-0.14) 314.65,-44.35 ; 319,33.55 ccw(c222.55,-0.14) 305.5,59.5 ; 319,33.55 ccw(c222.55,-0.14) 305.5,59.5 ; 319,33.55 ccw(c222.55,-0.14) 305.5,59.5 ; 319,33.55 ccw(c222.55,-0.14) 305.5,59.5 ; 314.65,-44.35 cw(c222.55,-0.14) 313.67,-46.33 ; 314.65,-44.35 cw(c222.55,-0.14) 313.67,-46.33 ; 314.65,-44.35 cw(c222.55,-0.14) 313.67,-46.33 ; 314.65,-44.35 cw(c222.55,-0.14) 313.67,-46.33 ; 313.67,-46.33 cw(c222.55,-0.14) 268.74,-91.26 ; 313.67,-46.33 cw(c222.55,-0.14) 268.74,-91.26 ; 313.67,-46.33 cw(c222.55,-0.14) 268.74,-91.26 ; 313.67,-46.33 cw(c222.55,-0.14) 268.74,-91.26 ; 305.5,59.5 ccw(c222.55,-0.14) 303.64,62 ; 305.5,59.5 ccw(c222.55,-0.14) 303.64,62 ; 305.5,59.5 ccw(c222.55,-0.14) 303.64,62 ; 305.5,59.5 ccw(c222.55,-0.14) 303.64,62 ; 303.64,62 ccw(c222.55,-0.14) 263.04,93.66 ; 303.64,62 ccw(c222.55,-0.14) 263.04,93.66 ; 303.64,62 ccw(c222.55,-0.14) 263.04,93.66 ; 303.64,62 ccw(c222.55,-0.14) 263.04,93.66 ; 268.74,-91.26 cw(c222.55,-0.14) 266.77,-92.23 ; 268.74,-91.26 cw(c222.55,-0.14) 266.77,-92.23 ; 268.74,-91.26 cw(c222.55,-0.14) 266.77,-92.23 ; 268.74,-91.26 cw(c222.55,-0.14) 266.77,-92.23 ; 266.77,-92.23 cw(c222.55,-0.14) 238.02,-101.12 ; 266.77,-92.23 cw(c222.55,-0.14) 238.02,-101.12 ; 266.77,-92.23 cw(c222.55,-0.14) 238.02,-101.12 ; 266.77,-92.23 cw(c222.55,-0.14) 238.02,-101.12 ; 263.04,93.66 ccw(c222.55,-0.14) 237,101 ; 263.04,93.66 ccw(c222.55,-0.14) 237,101 ; 263.04,93.66 ccw(c222.55,-0.14) 237,101 ; 263.04,93.66 ccw(c222.55,-0.14) 237,101 ; 237,101 ccw(c222.55,-0.14) 235.89,101.15 ; 237,101 ccw(c222.55,-0.14) 235.89,101.15 ; 237,101 ccw(c222.55,-0.14) 235.89,101.15 ; 237,101 ccw(c222.55,-0.14) 235.89,101.15
Button#43 [mil]
  round 10 smd: 1(120,0) 2(320,-40)
  Top Layer lines w10: 320.19,-12 146,-12 ; 319,26 150,26 ; 312,-47 160,-47 ; 304,6 142.4,6 127,6 126,6 ; 303,62 172,62 ; 291,-30 140.2,-30 129.7,-30 127,-30 ; 287,44 168,44 135.9,44 134,44 ; 268,-65 230.4,-65 223.7,-65 149,-65 ; 238.02,-101.12 ccw(c222.55,-0.14) 314.65,-44.35 ccw(c222.55,-0.14) 316.61,-40 ccw(c222.55,-0.14) 320.19,-30.19 ccw(c222.55,-0.14) 235.89,101.15 ; 211.96,-101.38 cw(c223.45,0.14) 146.7,-67.3 ; 211.96,-101.38 cw(c223.45,0.14) 146.7,-67.3 ; 211.96,-101.38 cw(c223.45,0.14) 146.7,-67.3 ; 211.96,-101.38 cw(c223.45,0.14) 146.7,-67.3 ; 208.82,101.24 ccw(c223.45,0.14) 128.95,38.95 ; 208.82,101.24 ccw(c223.45,0.14) 128.95,38.95 ; 208.82,101.24 ccw(c223.45,0.14) 128.95,38.95 ; 208.82,101.24 ccw(c223.45,0.14) 128.95,38.95 ; 146.7,-67.3 cw(c223.45,0.14) 144.74,-65 ; 146.7,-67.3 cw(c223.45,0.14) 144.74,-65 ; 146.7,-67.3 cw(c223.45,0.14) 144.74,-65 ; 146.7,-67.3 cw(c223.45,0.14) 144.74,-65 ; 144.74,-65 cw(c223.45,0.14) 135.15,-51.25 ; 144.74,-65 cw(c223.45,0.14) 135.15,-51.25 ; 144.74,-65 cw(c223.45,0.14) 135.15,-51.25 ; 144.74,-65 cw(c223.45,0.14) 135.15,-51.25 ; 135.15,-51.25 cw(c223.45,0.14) 135.01,-51.01 ; 135.15,-51.25 cw(c223.45,0.14) 135.01,-51.01 ; 135.15,-51.25 cw(c223.45,0.14) 135.01,-51.01 ; 135.15,-51.25 cw(c223.45,0.14) 135.01,-51.01 ; 135.01,-51.01 cw(c223.45,0.14) 127,-33.55 ; 135.01,-51.01 cw(c223.45,0.14) 127,-33.55 ; 135.01,-51.01 cw(c223.45,0.14) 127,-33.55 ; 135.01,-51.01 cw(c223.45,0.14) 127,-33.55 ; 128.95,38.95 ccw(c223.45,0.14) 127.72,35.82 ; 128.95,38.95 ccw(c223.45,0.14) 127.72,35.82 ; 128.95,38.95 ccw(c223.45,0.14) 127.72,35.82 ; 128.95,38.95 ccw(c223.45,0.14) 127.72,35.82 ; 127.72,35.82 ccw(c223.45,0.14) 127,33.82 ; 127.72,35.82 ccw(c223.45,0.14) 127,33.82 ; 127.72,35.82 ccw(c223.45,0.14) 127,33.82 ; 127.72,35.82 ccw(c223.45,0.14) 127,33.82 ; 127,-33.55 cw(c223.45,0.14) 121.99,-11.79 ; 127,-33.55 cw(c223.45,0.14) 121.99,-11.79 ; 127,-33.55 cw(c223.45,0.14) 121.99,-11.79 ; 127,-33.55 cw(c223.45,0.14) 121.99,-11.79 ; 127,33.82 ccw(c223.45,0.14) 126,30.81 ; 127,33.82 ccw(c223.45,0.14) 126,30.81 ; 127,33.82 ccw(c223.45,0.14) 126,30.81 ; 127,33.82 ccw(c223.45,0.14) 126,30.81 ; 126,30.81 ccw(c223.45,0.14) 121.7,9.31 ; 126,30.81 ccw(c223.45,0.14) 121.7,9.31 ; 126,30.81 ccw(c223.45,0.14) 121.7,9.31 ; 126,30.81 ccw(c223.45,0.14) 121.7,9.31 ; 121.99,-11.79 cw(c223.45,0.14) 121.7,-9.03 ; 121.99,-11.79 cw(c223.45,0.14) 121.7,-9.03 ; 121.99,-11.79 cw(c223.45,0.14) 121.7,-9.03 ; 121.99,-11.79 cw(c223.45,0.14) 121.7,-9.03 ; 121.7,-9.03 cw(c223.45,0.14) 121.29,0 ; 121.7,-9.03 cw(c223.45,0.14) 121.29,0 ; 121.7,-9.03 cw(c223.45,0.14) 121.29,0 ; 121.7,-9.03 cw(c223.45,0.14) 121.29,0 ; 121.7,9.31 ccw(c223.45,0.14) 121.33,2.93 ; 121.7,9.31 ccw(c223.45,0.14) 121.33,2.93 ; 121.7,9.31 ccw(c223.45,0.14) 121.33,2.93 ; 121.7,9.31 ccw(c223.45,0.14) 121.33,2.93 ; 121.33,2.93 ccw(c223.45,0.14) 121.29,1.29 ; 121.33,2.93 ccw(c223.45,0.14) 121.29,1.29 ; 121.33,2.93 ccw(c223.45,0.14) 121.29,1.29 ; 121.33,2.93 ccw(c223.45,0.14) 121.29,1.29 ; 121.29,0 cw(c223.45,0.14) 121.29,1.29 ; 121.29,0 cw(c223.45,0.14) 121.29,1.29 ; 121.29,0 cw(c223.45,0.14) 121.29,1.29 ; 121.29,0 cw(c223.45,0.14) 121.29,1.29